# Altium PCB aig2.PcbDoc
Units mm, origin at the board's own origin, x right, y up, seen from the top; angles counter-clockwise.
Board outline 80 x 80 mm, 2 copper layers (Top Layer, Bottom Layer), stack 1.571 mm thick; 98 components, 66 nets, 281 pads, 40 vias.
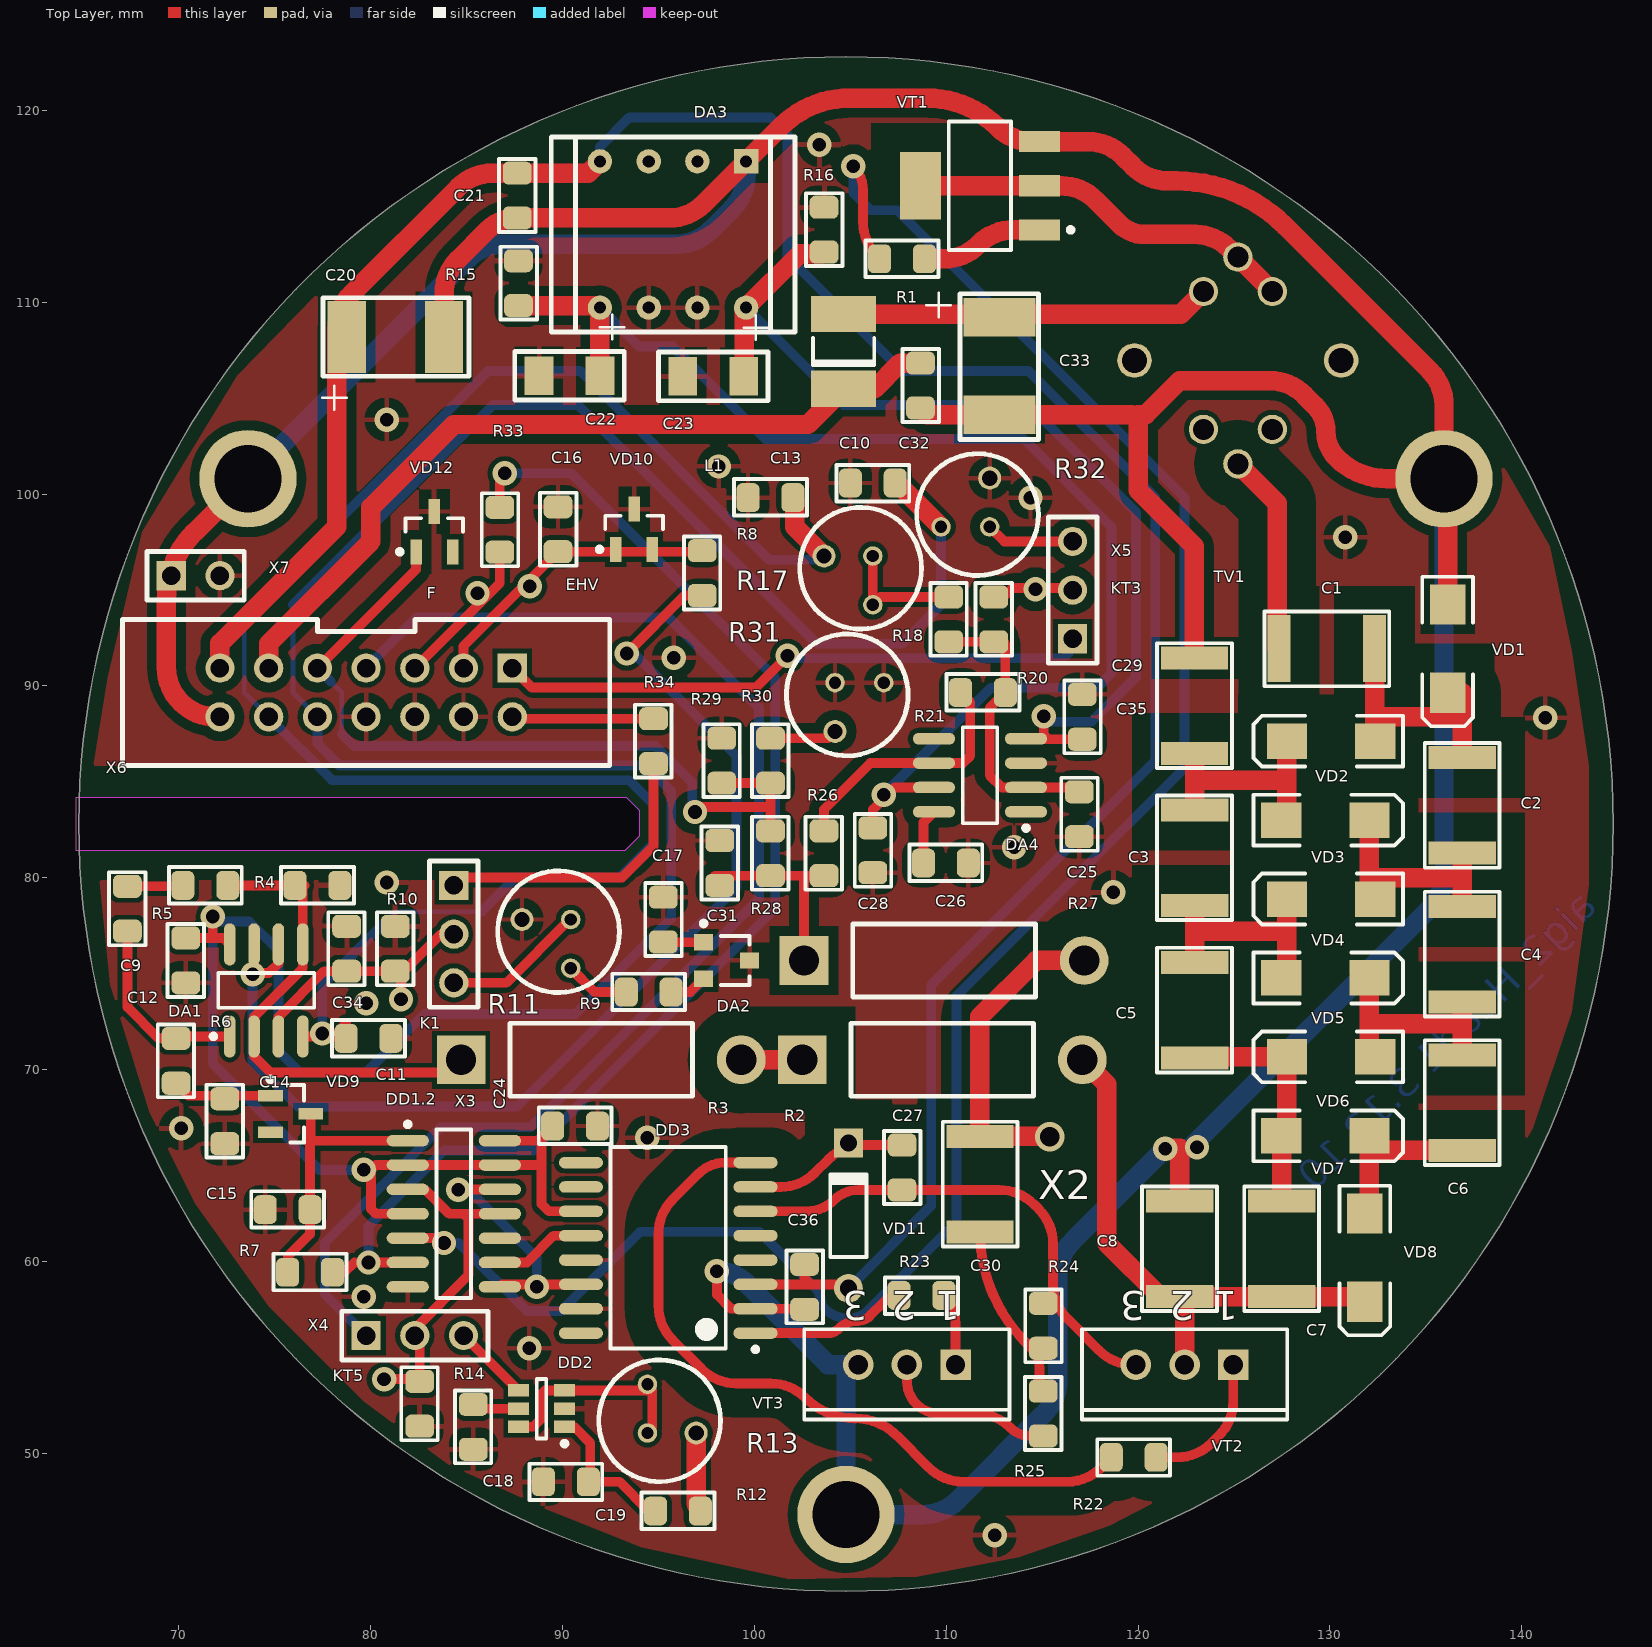
[diagram p0: Top Layer view]
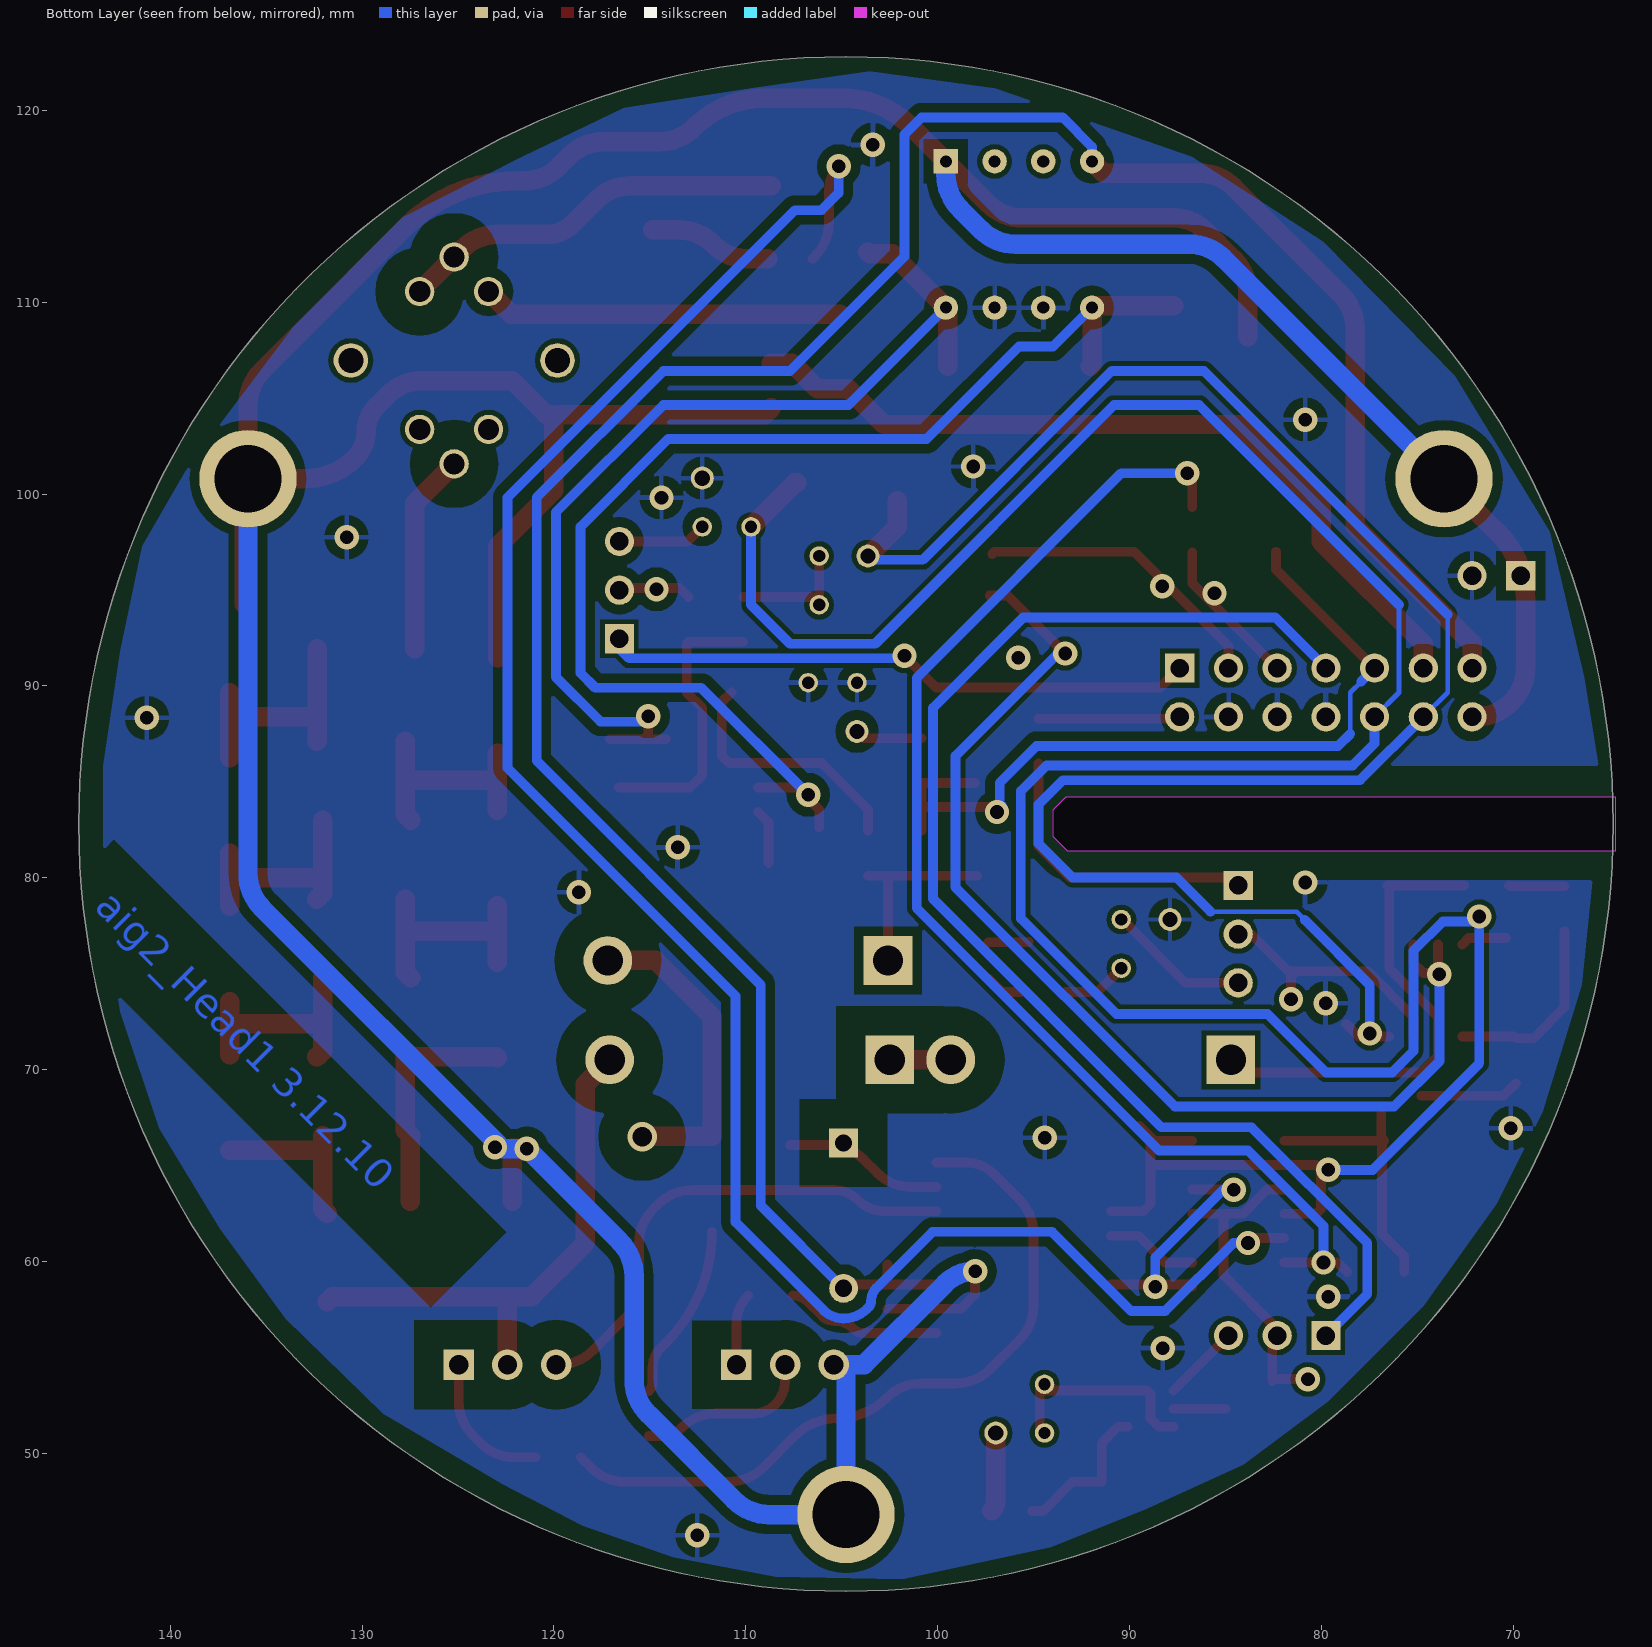
[diagram p1: Bottom Layer view, seen from below]
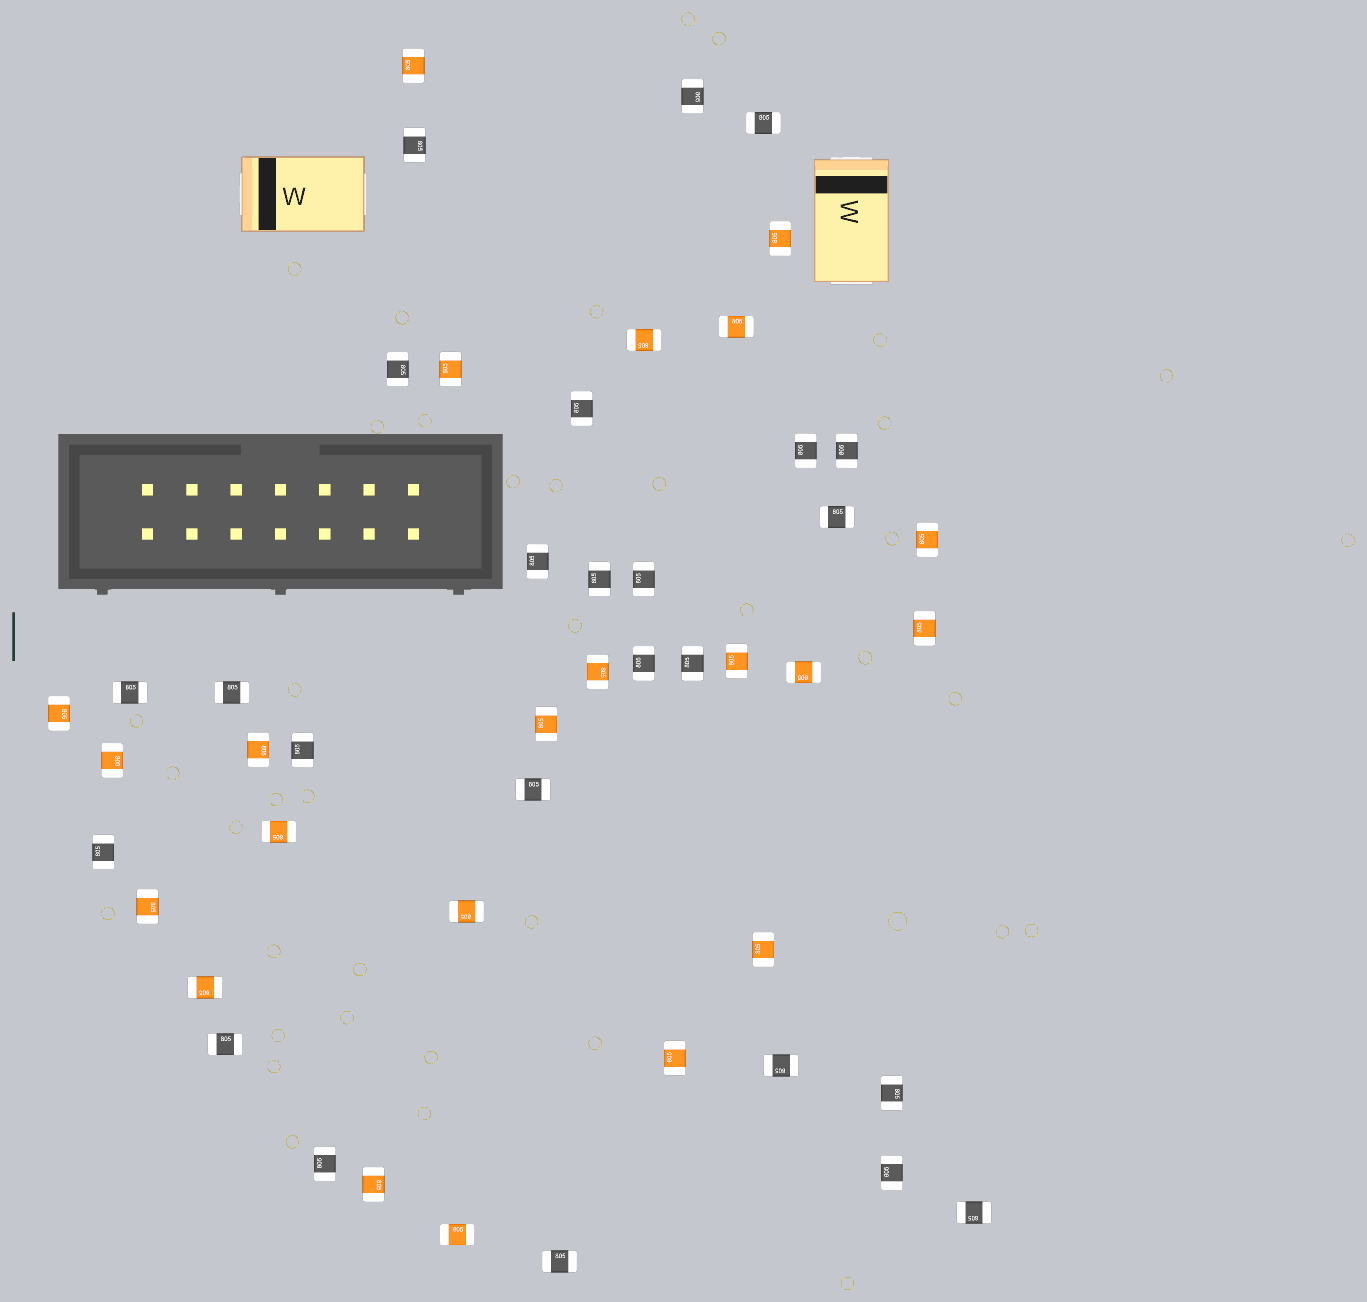
[diagram p2: 3D render of the assembled board from above, using the file's embedded part models]

## Layer stack, top to bottom
Top Layer: signal copper 0.0356
Dielectric: core 1.5, FR-4, Dk 4.8
Bottom Layer: signal copper 0.0356

## Board outline
64.775,82.804 cw(c104.775,82.804) 104.775,122.804 cw(c104.775,82.804) 144.775,82.804 cw(c104.775,82.804) 104.775,42.804 cw(c104.775,82.804)
cut-out: 64.643,84.201 93.325,84.201 93.996,83.53 93.996,82.169 93.99,82.169 93.228,81.407 64.643,81.407

## Design rules (kind name [scope] priority, off if disabled: settings)
Clearance lv_+24 [InNetClass('LV_+24') vs InNetClass('LV_+24')] p1: gap=0.508
Clearance nonet_pads [NOT InNet('*') AND IsPad] p2: gap=0.254
Clearance lv [InNetClass('LV') vs InNetClass('LV')] p3: gap=0.254
Clearance lv-lv_24 [InNetClass('LV_+24') vs InNetClass('LV')] p4: gap=0.508
Clearance [All] p5: gap=1.524
ComponentClearance [All] p1 off: gap=0.254 collisioncheckmode=3 verticalgap=0.254 showdistances=FALSE
MinimumSolderMaskSliver [All] p1 off: minsoldermaskwidth=0.254
PolygonConnect [All] p1: connectstyle=Relief reliefconductorwidth=0.254 reliefentries=4 polygonreliefangle="90 Angle"
RoutingVias [All] p1: holewidth=0.711 width=1.27 viastyle="Through Hole" minholewidth=0.711 minwidth=1.27 maxholewidth=0.711 maxwidth=1.27
SilkToSilkClearance [All] p1 off: silktosilkclearance=0.254
SilkscreenOverComponentPads [All] p1 off: minsilkscreentomaskgap=0.254
SolderMaskExpansion [All] p1: expansion=0.102
Width [All] p1: maxlimit=1.016 minlimit=0.254 preferedwidth=0.508
24 further rules are at their usual default settings.

## Classes and differential pairs
net class LV: 2F +3.3V +12.6V -3.3V CONT2ASS CONT2U EASS EHV F GND GND_EXT NetC9_1 NetC9_2 NetC14_1 NetC15_1 NetC17_1 NetC18_1 NetC19_2 NetC25_2 NetC26_2 NetC31_2 NetC34_2 NetDA1_2 NetDA1_6 NetDA2_2 NetDD1.2_3 NetDD1.2_5 NetDD1.2_6 NetDD1.2_8 NetDD1.2_9 NetDD2_3 NetDD2_4 NetDD3_1 NetR9_2 NetR11_2 NetR12_1 NetR17_1 NetR30_1 NetR34_2
net class HV1200: NetC7_2 NetC27_1 NetC27_2 NetDD3_8 NetR22_2
net class LV_+24: +12.6V +24V +EGB -24V EASS GND GND_EXT NetC25_2 NetC26_2 NetC31_2 NetC33_1 NetDA4_6 NetDD1.2_5 NetDD3_1 NetR20_1 NetR30_1 NetR32_2

## Components (designator, comment, footprint, x,y, rotation, side; value= is the part's Value field where it differs from the comment)
C1 "CC1812" CC1812 129.794,91.948 r0 top
C2 "CC1812" CC1812 136.906,83.82 r270 top
C3 "CC1812" CC1812 122.956,81.091 r270 top
C4 "CC1812" CC1812 136.906,76.073 r270 top
C5 "CC1812" CC1812 122.956,73.152 r270 top
C6 "CC1812" CC1812 136.906,68.326 r270 top
C7 "CC1812" CC1812 127.494,60.706 r270 top
C8 "CC1812" CC1812 122.174,60.706 r270 top
C9 "C0805" CC0805 67.31,78.386 r270 top
C10 "C0805" CC0805 106.172,100.584 r0 top
C11 "C0805" CC0805 79.883,71.628 r180 top
C12 "C0805" CC0805 70.358,75.692 r270 top
C13 "C0805" CC0805 100.838,99.822 r180 top
C14 "C0805" CC0805 72.39,67.31 r270 top
C15 "C0805" CC0805 75.665,62.7 r180 top
C16 "C0805" CC0805 89.762,98.171 r90 top
C17 "C0805" CC0805 95.25,77.824 r90 top
C18 "C0805" CC0805 85.344,51.374 r270 top
C19 "C0805" CC0805 90.17,48.514 r0 top
C20 "T492C" "CAPASITOR C" 78.74,108.204 r0 top
C21 "C0805" CC0805 87.63,115.57 r90 top
C22 "CAPASITOR A" "CAPASITOR A" 91.948,106.172 r180 top
C23 "CAPASITOR A" "CAPASITOR A" 99.441,106.144 r180 top
C24 "C0805" CC0805 90.653,67.056 r180 top
C25 "C0805" CC0805 116.94,83.312 r90 top
C26 "C0805" CC0805 109.982,80.772 r180 top
C27 "C0805" CC0805 107.696,64.897 r90 top
C28 "C0805" CC0805 106.172,81.434 r90 top
C29 "C0805" CC0805 117.094,88.392 r90 top
C30 "CC1812" CC1812 111.76,63.981 r90 top
C31 "C0805" CC0805 98.198,80.772 r270 top
C32 "C0805" CC0805 108.66,105.664 r90 top
C33 "T492C" "CAPASITOR C" 112.776,109.22 r270 top
C34 "C0805" CC0805 78.74,76.3 r270 top
C35 "CC1812" CC1812 122.936,88.93 r90 top
C36 "C0805" CC0805 102.616,58.674 r90 top
DA1 "MAX4163ESA" NSO8_N 74.549,74.128 r90 top
DA2 "MAX6120EUR" sot23 98.552,75.692 r270 top
DA3 "AM1P-DZ" Am1p 99.568,117.348 r270 top
DA4 "OPA454IDDA" 182H_N 111.76,85.344 r180 top
DD1.2 "SN74HC74D" D014_N 84.328,62.484 r0 top
DD2 "sn74lvc2g14idbv" sot23-6_N 88.9,52.324 r180 top
DD3 "IR2213S" SOIC16_N 95.504,60.706 r180 top
L1 "LQH43CN101K" 1812 104.648,107.442 r90 top
R1 "" RR0805 107.696,112.268 r180 top
R2 "RES15MM" RES15MM 102.489,70.512 r0 top
R3 "RES15MM" RES15MM 84.709,70.512 r0 top
R4 "" RR0805 77.216,79.602 r180 top
R5 "" RR0805 71.374,79.602 r180 top
R6 "" RR0805 69.85,70.458 r270 top
R7 "" RR0805 76.835,59.436 r180 top
R8 "" RR0805 97.282,95.885 r270 top
R9 "" RR0805 94.488,74.041 r180 top
R10 "" RR0805 81.28,76.3 r270 top
R11 "82p" 82p 90.424,75.284 r90 top
R12 "" RR0805 96.012,46.99 r180 top
R13 "82p" 82p 94.422,53.594 r270 top
R14 "" RR0805 82.55,52.578 r270 top
R15 "" RR0805 87.7,110.998 r90 top
R16 "" RR0805 103.632,113.792 r90 top
R17 "82p" 82p 106.172,94.234 r90 top
R18 "" RR0805 110.132,93.472 r270 top
R20 "" RR0805 112.482,93.472 r270 top
R21 "" RR0805 111.914,89.662 r180 top
R22 "" RR0805 119.774,49.784 r0 top
R23 "" RR0805 108.712,58.226 r0 top
R24 "" RR0805 115.062,56.642 r90 top
R25 "" RR0805 115.062,52.07 r270 top
R26 "" RR0805 103.632,81.28 r270 top
R27 "RES15MM" RES15MM 102.589,75.692 r0 top
R28 "" RR0805 100.838,81.28 r270 top
R29 "" RR0805 98.298,86.106 r270 top
R30 "" RR0805 100.838,86.106 r270 top
R31 "82p" 82p 106.743,90.17 r180 top
R32 "82p" 82p 109.728,98.298 r0 top
R33 "" RR0805 86.728,98.144 r90 top
R34 "" RR0805 94.742,87.122 r270 top
TV1 "KV4" kv4 125.204,101.582 r135 top
VD1 "S1M" DO214 136.144,91.948 r270 top
VD2 "S1M" DO214 130.062,87.122 r180 top
VD3 "S1M" DO214 129.762,83.007 r0 top
VD4 "S1M" DO214 130.062,78.892 r180 top
VD5 "S1M" DO214 129.762,74.778 r0 top
VD6 "S1M" DO214 130.062,70.663 r180 top
VD7 "S1M" DO214 129.762,66.548 r0 top
VD8 "S1M" DO214 131.826,60.198 r270 top
VD9 "BAT54A" SOT23_N 75.819,67.691 r0 top
VD10 "BAT54A" SOT23_N 93.726,98.171 r90 top
VD11 "BY255" SOD27 104.902,62.384 r90 top
VD12 "BAT54A" SOT23_N 83.312,98.044 r90 top
VT1 "IRLL2705" SOT-223 111.76,116.078 r90 top
VT2 "STP3N50" TO-220AB 122.428,54.61 r180 top
VT3 "STP3N50" TO-220AB 107.95,54.614 r180 top
X3 "JP3" "PLS-3 2.54" 84.328,79.602 r270 top
X4 "JP3" "PLS-3 2.54" 79.756,56.134 r0 top
X5 "JP3" "PLS-3 2.54" 116.586,92.456 r90 top
X6 "IDC14M" IDC14M 87.376,90.932 r180 top
X7 "PLS-2" "PLS-2 2.54" 69.596,95.748 r0 top

## Footprints (in the part's own frame and the unit in brackets; to place one, negate y for a bottom-side part, rotate by r counter-clockwise, add the part's x,y. Pads: shape width x height; smd on the part's side, far side on the other; paste and mask are expansions set on the pad)
82p [mil]
  round 40 hole 25: 1(0,0) 2(100,0)
  round 47.24 hole 31.5: 3(100,100)
  silkscreen extent -50,-100 200,150
182H_N [mm] "SOIC, 8-Leads, Body 4.9x3.9mm, Pitch 1.27mm, IPC Medium Density"
  oval 2.2x0.6 smd: 1(-2.4,1.905) 2(-2.4,0.635) 3(-2.4,-0.635) 4(-2.4,-1.905) 5(2.4,-1.905) 6(2.4,-0.635) 7(2.4,0.635) 8(2.4,1.905)
  silkscreen extent -2.53,-2.5 0.9,2.88, body extent -1.95,-2.45 1.95,2.45, height 1.75
1812 [mm] "Chip Capacitor; Body 4.5 x 3.2 mm (LxW typ)"
  rect 1.9x3.4 smd: 1(-1.95,0) 2(1.95,0)
  silkscreen extent -0.7,-1.6 0.7,1.6
Am1p [mm]
  rect 1.27x1.27 hole 0.635: 1(0,0)
  round 1.27 hole 0.635: 2(0,-2.54) 3(0,-5.08) 4(0,-7.62) 5(7.62,-7.62) 6(7.62,-5.08) 7(7.62,-2.54) 8(7.62,0)
  silkscreen extent -1.27,-10.16 8.89,2.54, body extent -1.27,-10.16 8.89,2.54, height 8.15
"CAPASITOR A" [mm]
  rect 1.5x2 smd: 1(0,0) 2(3.175,0)
  silkscreen extent -1.27,-3.17 4.44,1.27
"CAPASITOR C" [mm]
  rect 2x3.75 smd: 1(0,0) 2(5.08,0)
  silkscreen extent -1.27,-3.81 6.38,2.04, body extent -1.08,-2.18 6.22,2.12, height 1.5
CC0805 [mm]
  rrect50% 1.2x1.5 smd: 1(-1.17,0) 2(1.17,0)
  silkscreen extent -1.9,-0.96 1.9,0.94, body extent -1.03,-0.62 0.97,0.63, height 0.78
CC1812 [mm]
  rect 1.2x3.5 smd: 1(-2.44,0) 2(2.54,0)
  silkscreen extent -3.2,-1.96 3.3,1.94
D014_N [mm] "SOIC, 14-Leads, Body 8.7x3.9mm, Pitch 1.27mm, IPC Medium Density"
  oval 2.2x0.6 smd: 1(-2.4,3.81) 2(-2.4,2.54) 3(-2.4,1.27) 4(-2.4,0) 5(-2.4,-1.27) 6(-2.4,-2.54) 7(-2.4,-3.81) 8(2.4,-3.81) 9(2.4,-2.54) 10(2.4,-1.27) 11(2.4,0) 12(2.4,1.27) 13(2.4,2.54) 14(2.4,3.81)
  silkscreen extent -2.52,-4.4 0.9,4.78, body extent -1.95,-4.33 1.95,4.33, height 1.75
DO214 [mm] "DO-214-AC/SMA; 2 C-Bend Leads; Body 5.3 x 2.6 mm, inc. leads (LxW)"
  rect 2.1x1.85 smd: 1(-2.3,0) 2(2.3,0)
  silkscreen extent -3.75,-1.33 4.05,1.33
IDC14M [mil]
  rect 60x60 hole 38: 1(0,0)
  round 60 hole 38: 2(0,100) 3(100,0) 4(100,100) 5(200,0) 6(200,100) 7(300,0) 8(300,100) 9(400,0) 10(400,100) 11(500,0) 12(500,100) 13(600,0) 14(600,100)
  silkscreen extent -200,-100 800,200, body extent -211,-137 791,225, height 130
kv4 [mm]
  round 1.524 hole 1.1: 1(0,0) 2(2.54,0) 3(7.62,-5.08) 4(7.62,-7.62) 5(5.08,-7.62) 6(0,-2.54)
  round 1.8 hole 1.3: 7(7.62,0) 8(0,-7.62)
NSO8_N [mm] "SOIC, 8-Leads, Body 4.9x3.9mm, Pitch 1.27mm, IPC Medium Density"
  oval 2.2x0.6 smd: 1(-2.4,1.905) 2(-2.4,0.635) 3(-2.4,-0.635) 4(-2.4,-1.905) 5(2.4,-1.905) 6(2.4,-0.635) 7(2.4,0.635) 8(2.4,1.905)
  silkscreen extent -2.52,-2.5 0.9,2.88, body extent -2,-2.5 2,2.5, height 1.75
"PLS-2 2.54" [mil]
  rect 60x60 hole 38: 1(0,0)
  round 60 hole 38: 2(100,0)
  silkscreen extent -50,-50 150,50
"PLS-3 2.54" [mil]
  rect 60x60 hole 38: 1(0,0)
  round 60 hole 38: 2(100,0) 3(200,0)
  silkscreen extent -50,-50 250,50
RES15MM [mil]
  rect 100x100 hole 62: 1(0,0)
  round 100 hole 62: 2(575,0)
  silkscreen extent 100,-75 475,75
RR0805 [mm]
  rrect50% 1.2x1.5 smd: 1(-1.17,0) 2(1.17,0)
  silkscreen extent -1.9,-0.96 1.9,0.94, body extent -1,-0.62 1,0.62, height 0.78
SOD27 [mm] "Diode, Axial; Body 4.3 x 1.9 mm (LxDia. max), Lead Dia. 0.56 mm (max)"
  round 1.5 hole 0.9: 1(-3.79,0)
  rect 1.5x1.5 hole 0.9: 2(3.79,0)
  silkscreen extent -2.15,-0.95 2.25,0.95
SOIC16_N [mm] "SOIC, 16-Leads, Body 10.3x7.5mm, Pitch 1.27mm, IPC Medium Density"
  oval 2.3x0.6 smd: 1(-4.55,4.445) 2(-4.55,3.175) 3(-4.55,1.905) 4(-4.55,0.635) 5(-4.55,-0.635) 6(-4.55,-1.905) 7(-4.55,-3.175) 8(-4.55,-4.445) 9(4.55,-4.445) 10(4.55,-3.175) 11(4.55,-1.905) 12(4.55,-0.635) 13(4.55,0.635) 14(4.55,1.905) 15(4.55,3.175) 16(4.55,4.445)
  silkscreen extent -4.67,-5.25 3,5.42, body extent -3.75,-5.15 3.75,5.15, height 2.65
sot23 [mm] "SOT-23; 3 Leads; Body 3.0 x 2.5 mm, inc. leads (LxW max)"
  rect 0.85x1 smd: 1(-0.95,-1.2) 2(0.95,-1.2) 3(0,1.2)
  silkscreen extent -2.05,-1.32 1.28,1.2
sot23-6_N [mm] "SOT23, 6-Leads, Body 2.9x1.6mm, Pitch 0.95mm, Lead Span 2.8mm, IPC Medium Density"
  rect 1.1x0.65 smd: 1(-1.2,0.95) 2(-1.2,0) 3(-1.2,-0.95) 4(1.2,-0.95) 5(1.2,0) 6(1.2,0.95)
  silkscreen extent -1.33,-1.55 0.25,1.95, body extent -0.9,-1.55 0.9,1.55, height 1.45
SOT23_N [mm] "SOT23, 3-Leads, Body 2.9x1.3mm, Pitch 0.95mm, Lead Span 2.3mm, IPC Medium Density"
  rect 1.3x0.6 smd: 1(-1.05,0.95) 2(-1.05,-0.95) 3(1.05,0)
  silkscreen extent -1.17,-1.5 0.7,1.92, body extent -0.7,-1.5 0.7,1.5, height 1.1
SOT-223 [mm] "SOT-223/SC-73; 4 Leads; Body 6.7 x 7.3 mm, inc. leads (LxW max)"
  rect 1.1x2.15 smd: 1(-2.3,-3.1) 2(0,-3.1) 3(2.3,-3.1)
  rect 3.5x2.15 smd: 4(0,3.1)
  silkscreen extent -3.35,-4.85 3.35,1.63
TO-220AB [mm] "TO, Thru-Hole, Vertical, Heatsink Mounted; 3 In-Line Leads; Pitch 2.54 mm"
  rect 1.6x1.6 hole 1: 1(-2.54,0)
  round 1.6 hole 1: 2(0,0) 3(2.54,0)
  silkscreen extent -5.35,-1.85 5.35,2.85

## Part data
C9 C10 C11 C12 C13 C14 C15 C16 C17 C18 C19 C21 C24 C25 C26 C27 C28 C29 C31 C32 C34 C36: "Ceramic Chip Capacitor - Standard"
C20 C33: "Solid Tantalum Chip Capacitor, T492 Series - CWR11 Style Per Mil-PRF-55365/8"
DA1: "Dual Micropower, Single-Supply, Rail-to-Rail I/O Op Amp"
DA2: library part MAX6120, "Микросхема"
DA3: "DC/DC Перобразователь"
DA4: library part OPA27GU, "Ultra-Low-Noise Precision Operational Amplifiers"
DD1.2: "Dual D-Type Positive-Edge-Triggered Flip-Flop with Clear and Preset"
DD2: "Микросхема"
DD3: library part IR2113S, "High and Low Side Driver"
L1: library part CDRH127, "Дроссель"
R1 R4 R5 R6 R7 R8 R9 R10 R12 R14 R15 R16 R18 R20 R21 R22 R23 R24 R25 R26 R28 R29 R30 R33 R34: library part R_0805, "R_0805"
R11 R13 R17 R31 R32: "Резистор"
TV1: "Трансформатор"
VD1 VD2 VD3 VD4 VD5 VD6 VD7 VD8: library part BZG03C10, "Silicon Zener Diode (3W)"
VD9 VD10 VD12: "Schottky Barrier Double Diode"
VD11: library part BZX79-B15, "Диод"
VT1: "HEXFET Power MOSFET"
VT2 VT3: library part IRF740, "HEXFET N-Channel Power MOSFET"

## Free pads (board coordinates)
  round 5.08 hole 3.5: 0(73.598,100.804) 0(104.775,46.804) 0(135.952,100.804)

## Via types
v1: diameter 1.27, hole 0.711, Top Layer to Bottom Layer, 39 vias
v2: diameter 1.524, hole 1.016, Top Layer to Bottom Layer, 1 vias

## Nets (pads, with @x,y where several pads share a name; then routed paths per layer and width w, separated by ;. In a path a pad name is that pad's centre, name@x,y a point inside that pad or via, vN(x,y) a via of type N, cw(c..) or ccw(c..) an arc to the next point about the centre after c; other vN are vias at no path point)
2F: X4.1 X6.7 | length 69.3
  Bottom Layer w0.508: X4.1 77.597,58.293 77.597,60.96 83.629,66.992 88.328,66.992 100.244,78.908 100.244,88.859 95.535,93.568 82.392,93.568 X6.7
+3.3V: C10.2 C12.1 C24.2 DA1.8 DD1.2.2 DD1.2.4 DD1.2.13 DD1.2.14 DD3.11 R32.1 X6.10 | length 162.4
  Top Layer w0.508: C12.1 71.755,76.862 ; v1(71.755,77.978) 71.755,76.862 ; DA1.8 72.31,76.862 71.755,76.862 ; v1@79.883,64.643 v1@80.01,64.77 ; DD1.2.4 80.264,62.484 80.01,62.738 v1@80.01,64.77 ; DD1.2.14 88.721,66.294 88.9,66.473 ; C24.2 88.9,66.473 ; DD3.11 89.281,62.611 88.9,62.992 88.9,65.024 ; v1@80.01,64.77 80.264,65.024 DD1.2.2 DD1.2.13 88.9,65.024 ; 88.9,65.024 88.9,66.473
  Top Layer w1.016: C10.2 107.442,100.584 R32.1
  Bottom Layer w0.254: 75.946,94.234 75.946,89.662 X6.10
  Bottom Layer w0.508: 75.946,94.234 86.36,104.648 90.805,104.648 103.251,92.202 107.696,92.202 109.728,94.234 R32.1 ; X6.10 77.216,86.995 78.359,85.852 94.324,85.852 95.658,84.518 95.658,77.878 90.678,72.898 82.804,72.898 79.756,69.85 76.3,69.85 75.184,70.966 75.184,76.2 73.66,77.724 72.009,77.724 v1(71.755,77.978) 71.755,70.331 77.316,64.77 v1(79.629,64.77)
+12.6V: C20.1 C21.2 C36.2 DA3.4 DD3.3 VD11.1 X6.13 | length 134.2
  Top Layer w0.508: DD3.3 102.958,58.801 ; C36.2 102.616,59.143 102.958,58.801 ; VD11.1 104.695,58.801 102.958,58.801
  Top Layer w1.016: X6.13 72.136,92.216 78.232,98.312 78.232,108.617 cw(c80.772,108.617) 78.976,110.413 84.559,115.996 cw(c86.355,114.2) 86.355,116.74 C21.2 91.34,116.74 DA3.4
  Bottom Layer w0.508: DA3.4 91.948,118.11 93.472,119.634 100.838,119.634 101.727,118.745 101.727,112.395 107.696,106.426 114.3,106.426 120.904,99.822 120.904,86.106 109.22,74.422 109.22,62.912 VD11.1
+24V: C22.1 C28.2 DA3.5 DA4.7 R15.1 | length 65.5
  Top Layer w0.508: C28.2 106.172,83.566 107.315,84.709 DA4.7
  Top Layer w1.016: R15.1 91.848,109.828 DA3.5 91.948,106.78 C22.1@92.048,106.68
  Bottom Layer w0.508: DA3.5 93.98,107.696 95.758,107.696 100.584,102.87 114.046,102.87 118.618,98.298 118.618,90.678 117.847,89.907 112.323,89.907 v1(106.743,84.328)
+EGB: C32.2 L1.1 X6.11 | length 42.4
  Top Layer w1.016: X6.11 74.676,92.202 80.01,97.536 80.01,99.314 84.328,103.632 102.788,103.632 L1.1 106.254,105.492 107.596,106.834 C32.2
-3.3V: C11.2 C13.1 DA1.4 R17.3 X6.12 | length 98.4
  Top Layer w0.508: DA1.4 78.051,71.728 78.713,72.39
  Top Layer w1.016: C13.1@102.108,99.668 102.108,98.298 R17.3
  Bottom Layer w0.254: 73.406,93.726 73.406,89.662 X6.12 ; 80.853,77.805 81.28,78.232 85.769,78.232
  Bottom Layer w0.508: 73.406,93.726 86.106,106.426 90.922,106.426 100.773,96.575 103.433,96.575 R17.3 ; X6.12 77.978,85.09 93.472,85.09 94.742,83.82 94.742,81.788 92.964,80.01 87.547,80.01 85.769,78.232 ; v1(77.47,71.882) 77.47,74.422 80.853,77.805
-24V: C23.1 C29.1 DA3.8 DA4.4 R16.1 | length 52
  Top Layer w0.508: DA4.4@114.173,87.249 DA4.4 114.187,87.222 115.316,87.222 ; v1(115.085,88.42) 115.085,87.453 115.316,87.222 ; C29.1 115.316,87.222
  Top Layer w1.016: C23.1@99.468,106.68 99.468,109.628 DA3.8 102.362,112.522 103.532,112.522 R16.1
  Bottom Layer w0.508: DA3.8 104.648,104.648 114.3,104.648 119.888,99.06 119.888,90.454 117.572,88.138 115.085,88.138 v1(115.085,88.42)
CONT2ASS: X5.1 X6.1 | length 31.3
  Top Layer w0.508: X6.1 88.392,89.916 100.076,89.916 v1(101.727,91.567)
  Bottom Layer w0.508: v1(101.727,91.567) 101.854,91.44 116.078,91.44 X5.1@117.094,92.456
CONT2U: R34.1 X6.2 | length 7.4
  Top Layer w0.508: X6.2 87.476,88.292 R34.1
EASS: R28.1 R29.2 R30.2 VD12.1 X6.9 | length 42.3
  Top Layer w0.508: X6.9 82.362,96.078 VD12.1 ; v1@96.688,83.693 100.838,83.693 ; v1(96.901,83.428) v1@96.901,83.48 ; R29.2@98.044,84.936 R29.2 R30.2 100.838,83.693 ; R28.1 100.838,83.693
  Bottom Layer w0.254: 77.917,90.231 78.486,89.662 78.486,87.503
  Bottom Layer w0.508: X6.9 77.917,90.231 ; 78.486,87.503 79.121,86.868 94.84,86.868 96.763,84.944 96.763,84.063 ; v1@96.63,83.752 96.901,83.48 v1(96.901,83.428)
EHV: C16.1 R8.1 VD10.1 VD10.2 X6.3 | length 15.6
  Top Layer w0.508: X6.3 84.836,92.075 C16.1 97.028,97.001 R8.1@97.155,96.874
  other v1: 88.291,95.194
F: R33.1 X6.5 | length 7.9
  Top Layer w0.508: X6.5 86.728,95.364 R33.1
  other v1: 85.561,94.842
GND: C10.1 C11.1 C12.2 C13.2 C14.2 C15.2 C16.2 C17.2 C18.2 C19.1 C22.2 C23.2 C24.1 C25.1 C26.1 C28.1 C29.2 C31.1 C34.1 DA2.3 DA3.6 DA3.7 DA4.3 DD1.2.7 DD1.2.10 DD2.2 DD3.13 DD3.15 R4.1 R10.1 R11.3 R14.2 R15.2 R16.2 R29.1 R31.1 R31.2 R32.3 VD10.3 VD12.3 X6.4 X6.6 X6.8 X7.2
  other v1: 112.522,45.72 88.261,55.472 79.627,58.166 94.409,66.455 70.114,66.941 79.756,73.467 118.702,79.248 80.83,79.756 113.538,81.598 141.224,88.337 95.8,91.47 130.81,97.755 114.391,99.822 98.142,101.441 80.827,103.886 103.378,118.214
GND_EXT: C8.1 C20.2 C21.1 C32.1 C33.2 C35.2 C36.1 DA3.1 DD3.2 pad.0 VD1.1 VT1.3 VT3.3 X6.14 X7.1 | length 265.7
  Top Layer w0.508: v1(98.044,59.495) 98.044,58.265 98.778,57.531 DD3.2 102.589,57.531 C36.1
  Top Layer w1.016: X6.14 71.91,88.392 cw(c71.91,90.932) 70.114,89.136 70.086,89.164 cw(c71.882,90.96) 69.342,90.96 69.342,94.488 cw(c74.315,94.488) 70.799,98.004 pad.0@73.598,100.804 ; C20.2 83.82,110.453 cw(c86.36,110.453) 84.564,112.249 86.069,113.753 cw(c87.63,112.192) C21.1 95.568,114.4 ccw(c95.568,116.94) 97.364,115.144 DA3.1 101.394,119.174 cw(c104.958,115.609) 104.958,120.65 108.999,120.65 cw(c108.999,115.433) 112.688,119.122 ccw(c114.484,120.918) 114.484,118.378 VT1.3 117.399,118.378 cw(c117.399,115.838) 119.195,117.634 119.753,117.076 ccw(c121.549,118.872) 121.549,116.332 121.996,116.332 cw(c121.996,108.302) 127.674,113.98 135.208,106.446 cw(c133.412,104.65) 135.952,104.65 pad.0@135.952,100.804 ; C32.1 109.014,104.14 C33.2 119.634,104.14 ; v1(121.412,65.881) 121.435,65.904 122.174,65.904 C8.1 ; C35.2 122.936,97.282 120.018,100.2 120.018,104.14 120.396,104.14 122.174,105.918 126.865,105.918 cw(c126.865,103.378) 128.661,105.174 129.237,104.598 ; 129.237,104.598 cw(c127.891,103.253) 129.794,103.253 ccw(c131.713,103.253) 130.356,101.895 ccw(c132.991,104.53) 132.991,100.804 pad.0@135.952,100.804 ; pad.0@135.83,100.926 pad.0@135.952,100.804 ; VD1.1 136.144,100.34 ccw(c135.488,100.34) pad.0@135.952,100.804
  Bottom Layer w1.016: pad.0@73.598,100.804 85.08,112.286 cw(c86.876,110.49) 86.876,113.03 95.93,113.03 ccw(c95.93,115.57) 97.726,113.774 98.824,114.872 ccw(c97.028,116.668) 99.568,116.668 DA3.1 ; v1(98.044,59.495) cw(c98.044,57.308) 99.59,58.854 103.83,54.614 104.574,54.614 ; VT3.3 104.574,54.614 ; v1@122.682,65.881 v1(121.412,65.881) 116.568,61.037 ccw(c118.364,59.241) 115.824,59.241 115.824,53.832 cw(c113.284,53.832) 115.08,52.036 110.592,47.548 cw(c108.796,49.344) 108.796,46.804 104.775,46.804 104.775,54.413 104.574,54.614 ; v1@122.917,66.117 135.208,78.407 ccw(c133.412,80.203) 135.952,80.203 pad.0@135.952,100.804
  other v1: 123.078,65.956
NetC1_1: C1.1 TV1.1 | length 10.5
  Top Layer w1.016: TV1.1 127.254,99.532 C1.1@127.254,91.948
NetC1_2: C1.2 C2.1 VD1.2 VD2.1 | length 12.8
  Top Layer w1.016: C1.2 132.334,88.392 ; VD2.1 132.334,87.15 132.334,88.392 ; C2.1 136.906,88.392 ; VD1.2@136.906,89.648 136.906,88.392 ; 132.334,88.392 136.906,88.392
NetC2_2: C2.2 C4.1 VD3.2 VD4.1 | length 12
  Top Layer w1.016: VD3.2 132.062,80.264 ; VD4.1 132.062,79.192 132.062,80.264 ; C4.1 136.906,80.01 ; C2.2 136.906,80.01 ; 132.062,80.264 132.316,80.01 136.906,80.01
NetC3_1: C3.1 C35.1 VD2.2 VD3.1 | length 12.1
  Top Layer w1.016: C35.1 122.956,86.47 122.956,85.09 ; C3.1 122.956,85.09 ; VD3.1 127.762,83.307 127.762,85.217 ; VD2.2 127.762,85.217 ; 122.956,85.09 127.635,85.09 127.762,85.217
NetC3_2: C3.2 C5.1 VD4.2 VD5.1 | length 12
  Top Layer w1.016: C5.1 122.956,77.216 ; C3.2 122.956,77.216 ; VD5.1 127.762,75.078 127.762,77.139 ; VD4.2 127.762,77.139 ; 122.956,77.216 127.685,77.216 127.762,77.139
NetC4_2: C4.2 C6.1 VD5.2 VD6.1 | length 11.9
  Top Layer w1.016: VD5.2 132.062,72.39 ; VD6.1 132.062,70.963 132.062,72.39 ; C6.1 136.906,72.15 ; C4.2 136.906,72.15 ; 132.062,72.39 136.666,72.39 136.906,72.15
NetC5_2: C5.2 C7.1 VD6.2 VD7.1 | length 12.5
  Top Layer w1.016: C5.2 123.007,70.663 VD6.2 127.762,66.848 VD7.1@127.494,66.58 ; VD7.1 VD7.1@127.494,66.58 ; C7.1 VD7.1@127.494,66.58
NetC6_2: C6.2 VD7.2 VD8.1 | length 9
  Top Layer w1.016: VD8.1 132.062,62.734 VD7.2@132.062,65.881 ; VD7.2 VD7.2@132.062,65.881 ; C6.2 132.157,65.786 VD7.2@132.062,65.881
NetC7_2: C7.2 C8.2 R2.2 VD8.2 VT2.2 | length 28.5
  Top Layer w1.016: R2.2 118.364,69.242 118.364,60.96 121.158,58.166 C8.2 ; VT2.2 122.428,57.912 C8.2 ; VD8.2 131.558,58.166 C7.2 C8.2
NetC9_1: C9.1 R5.2 | length 2.9
  Top Layer w0.508: C9.1 70.158,79.556 R5.2
NetC9_2: C9.2 DA1.1 R6.1 | length 10
  Top Layer w0.508: C9.2 67.31,73.252 68.934,71.628 R6.1 69.95,71.728 DA1.1
NetC14_1: C14.1 R6.2 VD9.1 | length 5.2
  Top Layer w0.508: R6.2 70.497,68.641 VD9.1
NetC15_1: C15.1 DD1.2.1 R7.2 VD9.3 | length 14.2
  Top Layer w0.508: R7.2 75.665,60.252 76.835,61.422 C15.1 76.835,66.294 ; VD9.3 76.869,66.455 76.835,66.421 ; DD1.2.1 76.835,66.294 ; 76.835,66.294 76.708,66.294 76.835,66.421 ; 76.835,66.294 76.835,66.421
NetC17_1: C17.1 DA2.1 | length 2.1
  Top Layer w0.508: C17.1 95.262,76.642 DA2.1
NetC18_1: C18.1 DD2.5 | length 2.7
  Top Layer w0.508: C18.1@84.99,52.324 DD2.5
NetC19_2: C19.2 DD2.1 R12.2 | length 8
  Top Layer w0.508: DD2.1 90.612,51.374 91.44,50.546 91.44,48.514 92.964,48.514 94.488,46.99 R12.2 R12.2@95.096,46.99
NetC25_2: C25.2 DA4.2 R18.2 R20.2 R21.1 | length 14.8
  Top Layer w0.508: R18.2 R20.2 112.99,92.302 113.084,92.208 R21.1 112.268,88.846 112.268,85.344 112.903,84.709 DA4.2 C25.2@116.613,84.709
NetC26_2: C26.2 DA4.8 | length 2.9
  Top Layer w0.508: C26.2 108.812,82.891 DA4.8
NetC27_1: C27.1 DD3.6 R24.2 VT2.3 | length 25.9
  Top Layer w0.508: DD3.6 102.744,62.611 ccw(c102.744,64.585) 104.14,63.189 cw(c105.438,61.891) 105.438,63.727 C27.1 112.767,63.727 cw(c112.767,61.187) 114.563,62.983 114.826,62.72 cw(c113.03,60.924) 115.57,60.924 115.57,58.808 ccw(c118.11,58.808) 116.314,57.012 117.972,55.354 ccw(c119.768,57.15) 119.768,54.61 VT2.3
NetC27_2: C27.2 DD3.7 VD11.2 | length 8.3
  Top Layer w0.508: DD3.7 101.366,63.881 ccw(c101.366,66.421) 103.162,64.625 103.86,65.323 cw(c105.656,63.527) 105.656,66.067 C27.2
NetC30_1: C30.1 R24.1 R25.1 | length 9.2
  Top Layer w0.508: C30.1 ccw(c119.908,61.541) 114.146,55.78 114.413,55.513 cw(c113.335,54.434) 114.86,54.434 114.86,53.728 ccw(c115.55,53.728) R25.1
NetC30_2: C30.2 R27.2 | length 16.5
  Top Layer w1.016: v2(115.402,66.493) 115.374,66.521 C30.2 111.76,72.758 114.694,75.692 R27.2
NetC31_2: C31.2 R26.2 R27.1 R28.2 | length 10.1
  Top Layer w0.508: C31.2@97.944,80.11 R28.2 102.489,80.11 ; R27.1 102.589,80.01 102.489,80.11 ; R26.2 102.489,80.11
NetC33_1: C33.1 L1.2 TV1.3 | length 18.8
  Top Layer w1.016: L1.2@105.091,109.392 122.238,109.392 TV1.3
NetC34_2: C34.2 DA1.3 R10.2 X3.2 | length 13.5
  Top Layer w0.508: DA1.3 75.184,72.744 77.57,75.13 C34.2 R10.2 ; v1(81.578,73.66) 81.578,74.832 R10.2 ; X3.2 83.656,77.062 81.724,75.13 R10.2
NetDA1_2: DA1.2 DA1.5 R3.1 R4.2 R5.1 | length 25.4
  Top Layer w0.508: R5.1 R4.2 76.54,79.602 76.454,79.516 DA1.5 76.454,75.284 73.914,72.744 DA1.2 73.914,70.712 74.776,69.85 84.047,69.85 R3.1
NetDA1_6: DA1.6 DA1.7 R8.2 | length 59.7
  Top Layer w0.508: v1@73.787,74.93 v1(73.837,74.98) 73.887,75.03 v1@74.168,75.03 ; DA1.7 73.914,75.284 v1@74.168,75.03 ; DA1.6 75.184,75.538 74.676,75.03 v1@74.168,75.03 ; v1(93.345,91.694) 96.366,94.715 R8.2
  Bottom Layer w0.508: v1(73.837,74.98) 73.837,70.435 76.2,68.072 87.63,68.072 99.06,79.502 99.06,86.36 93.726,91.694 v1(93.345,91.694)
NetDA2_2: DA2.2 R9.1 | length 2
  Top Layer w0.508: R9.1 96.651,74.041 DA2.2
NetDA4_6: DA4.6 R21.2 R26.1 | length 13.4
  Top Layer w0.508: R26.1 103.632,83.566 106.045,85.979 DA4.6 110.871,85.979 111.252,86.36 111.252,89.154 R21.2
NetDD1.2_3: DD1.2.3 DD1.2.11 R14.1 X4.2 | length 17.3
  Top Layer w0.508: v1@80.692,53.874 R14.1@82.55,53.874 ; DD1.2.3 82.818,63.754 84.088,62.484 84.836,62.484 ; R14.1 R14.1@82.55,53.874 ; DD1.2.11 84.836,62.484 ; R14.1@82.55,53.874 82.55,55.88 X4.2 82.296,56.488 85.09,59.282 85.09,62.23 84.836,62.484
  other v1: 80.692,53.848
NetDD1.2_5: DD1.2.5 R1.2 | length 109.3
  Top Layer w0.508: DD1.2.5 83.82,61.214 v1(83.82,60.96) ; v1(105.156,117.094) cw(c103.93,115.868) 105.664,115.868 105.664,114.182 ccw(c108.204,114.182) 106.408,112.386 R1.2
  Bottom Layer w0.508: v1(83.82,60.96) 84.582,60.96 88.133,57.409 89.908,57.409 94.04,61.541 100.269,61.541 103.165,58.645 cw(c102.432,57.912) 103.469,57.912 ccw(c103.887,57.912) 103.591,57.617 ; 103.591,57.617 103.677,57.53 ccw(c104.902,58.755) 104.902,57.023 ccw(c104.902,58.501) 105.947,57.456 110.538,62.047 110.538,73.831 122.428,85.721 122.428,99.822 107.442,114.808 106.045,114.808 105.156,115.697 v1(105.156,117.094)
NetDD1.2_6: DD1.2.6 R7.1 R33.2 | length 65.2
  Top Layer w0.508: 78.64,59.436 79.148,59.944 ; v1(79.883,59.944) DD1.2.6 ; R33.2 86.728,100.832 v1(86.988,101.092)
  Bottom Layer w0.508: v1(79.883,59.944) 79.883,61.849 83.82,65.786 88.451,65.786 101.092,78.427 101.092,90.424 90.424,101.092 v1(86.988,101.092)
NetDD1.2_8: DD1.2.8 DD1.2.12 DD3.14 | length 12.5
  Top Layer w0.508: v1@85.09,63.754 DD1.2.12 ; DD1.2.8 86.855,58.801 DD3.14
  Bottom Layer w0.508: v1@85.09,63.754 88.646,60.198 v1(88.646,58.674)
  other v1: 84.555,63.727
NetDD1.2_9: DD1.2.9 DD3.12 | length 4.8
  Top Layer w0.508: DD1.2.9 88.138,59.944 89.535,61.341 DD3.12
NetDD2_3: DD2.3 DD2.6 R13.1 R13.2 | length 10.5
  Top Layer w0.508: DD2.6 88.458,51.374 88.9,51.816 88.9,53.086 89.088,53.274 DD2.3 94.667,53.274 94.676,53.265 R13.2@94.676,51.308
NetDD2_4: DD2.4 X4.3 | length 4
  Top Layer w0.508: X4.3 84.84,56.134 DD2.4
NetDD3_1: DD3.1 R23.1 | length 8.1
  Top Layer w0.508: DD3.1 103.846,56.261 ccw(c103.846,57.036) 104.394,56.488 cw(c105.379,55.503) 105.379,56.896 ccw(c105.379,57.825) 106.036,57.168 106.777,57.909 cw(c107.542,57.143) R23.1
NetDD3_8: DD3.8 R22.1 | length 38.5
  Top Layer w0.508: DD3.8 98.476,65.151 ccw(c98.476,63.189) 97.088,64.576 95.74,63.228 ccw(c97.536,61.432) 94.996,61.432 94.996,57.695 ccw(c97.536,57.695) 95.74,55.899 97.255,54.384 ccw(c99.051,56.18) 99.051,53.64 100.848,53.64 cw(c100.848,51.1) 102.644,52.896 ccw(c105.252,55.504) 105.252,51.816 cw(c105.252,48.74) 107.427,50.915 109.084,49.258 ccw(c110.88,51.054) 110.88,48.514 116.332,48.514 ccw(c116.332,50.933) 118.042,49.222 R22.1
NetR1_1: R1.1 VT1.1 | length 6.4
  Top Layer w1.016: R1.1 109.884,112.268 ccw(c109.884,114.808) 111.68,113.012 111.702,113.034 cw(c113.498,111.238) 113.498,113.778 VT1.1
NetR2_1: R2.1 R3.2 | length 3.2
  Top Layer w1.016: R3.2 R2.1
NetR9_2: R9.2 R11.1 | length 3.4
  Top Layer w0.508: R11.1 91.667,74.041 R9.2
NetR11_2: R11.2 X3.3 | length 7.5
  Top Layer w0.508: X3.3 87.068,74.522 90.37,77.824 R11.2
NetR12_1: R12.1 R13.3 | length 4.2
  Top Layer w0.508: R12.1 R12.1@97.216,47.024
  Top Layer w1.016: R13.3 96.962,47.521 ccw(c97.713,47.521) R12.1
NetR17_1: R17.1 R17.2 R18.1 | length 6.7
  Top Layer w0.508: R17.2 R17.1 106.58,94.642 R18.1
NetR20_1: R20.1 X5.2 | length 4.3
  Top Layer w0.508: R20.1@112.99,94.642 113.458,95.11 X5.2@117.094,95.11
  other v1: 114.654,95.047
NetR22_2: R22.2 VT2.1 | length 7.5
  Top Layer w0.508: R22.2 122.038,49.784 ccw(c122.038,52.324) 123.834,50.528 124.224,50.918 ccw(c122.428,52.714) 124.968,52.714 VT2.1
NetR23_2: R23.2 VT3.1 | length 3.8
  Top Layer w0.508: R23.2 cw(c108.414,56.758) 110.49,56.758 VT3.1
NetR25_2: R25.2 VT3.2 | length 9.2
  Top Layer w0.508: VT3.2 107.95,53.77 ccw(c109.684,53.77) 108.458,52.544 ccw(c109.602,53.688) 109.602,52.07 111.55,52.07 cw(c111.55,49.53) 113.346,51.326 ccw(c114.375,52.355) 114.375,50.9 R25.2
NetR30_1: R30.1 R31.3 | length 3.5
  Top Layer w0.508: R30.1 103.85,87.276 R31.3
NetR32_2: R32.2 X5.3 | length 5.1
  Top Layer w0.508: R32.2 113.03,97.536 X5.3 X5.3@117.094,97.536
NetR34_2: R34.2 X3.1 | length 15.6
  Top Layer w0.508: X3.1 84.736,80.01 93.091,80.01 94.742,81.661 R34.2
NetTV1_4: TV1.4 TV1.5 VT1.2 VT1.4 | length 20.3
  Top Layer w1.016: VT1.4 VT1.2 115.987,116.078 cw(c115.987,113.538) 117.783,115.334 119.032,114.086 ccw(c120.354,115.408) 120.354,113.538 122.972,113.538 cw(c122.972,110.998) 124.768,112.794 TV1.4 TV1.5
pads on no net: DA3.2 DA3.3 DA4.1 DA4.5 DD3.4 DD3.5 DD3.9 DD3.10 DD3.16 TV1.2 TV1.6 TV1.7 TV1.8 VD9.2 VD12.2

## Polygon pours and split planes (outlines as drawn)
GND on Top Layer "Top Layer-gnd_ext" (solid, remove dead copper, pour order 1000): 65.532,85.825 66.294,90.424 68.072,98.044 73.025,106.172 79.883,113.157 86.748,117.602 97.028,121.158 103.532,122.047 109.728,121.158 116.332,120.142 121.666,117.602 127.889,114.427 133.604,108.712 137.795,103.124 139.192,101.219 141.478,97.282 142.621,91.821 143.51,85.852 143.51,79.629 142.621,73.025 140.589,66.929 137.414,61.722 133.985,57.023 128.905,52.07 122.682,48.387 118.491,46.228 113.792,44.577 108.458,43.561 101.854,43.434 94.107,45.085 89.088,47.117 84.074,49.403 79.629,52.705 74.676,57.658 70.866,62.992 68.453,67.818 66.421,74.422 65.786,80.645 94.234,80.645 95.096,82.804 94.234,85.852
GND on Bottom Layer "Top Layer-gnd_ext" (solid, remove dead copper, pour order 1000): 65.532,85.825 66.294,90.424 68.072,98.044 73.025,106.172 79.883,113.157 86.748,117.602 97.028,121.158 103.532,122.047 109.728,121.158 116.332,120.142 121.666,117.602 127.889,114.427 133.604,108.712 137.795,103.124 139.192,101.219 141.478,97.282 142.621,91.821 143.51,85.852 143.51,79.629 142.621,73.025 140.589,66.929 137.414,61.722 133.985,57.023 128.905,52.07 122.682,48.387 118.491,46.228 113.792,44.577 108.458,43.561 101.854,43.434 94.107,45.085 89.088,47.117 84.074,49.403 79.629,52.705 74.676,57.658 70.866,62.992 68.453,67.818 66.421,74.422 65.786,80.645 94.234,80.645 95.096,82.804 94.234,85.852

## Other copper
Bottom Layer:
  text "aig2_Head1 3.12.10" at 144.018,78.407 h1.52 r45

## Silkscreen, mask and mechanical layers (free items; w line width, h text height)
Top Overlay:
  text "EHV" at 90.17,94.996 h0.61
  text "KT3" at 118.587,94.797 h0.61
  text "F" at 82.906,94.539 h0.61
  text "K1" at 82.542,72.136 h0.61
  text "X2" at 114.808,63.246 h1.52
  text "KT5" at 78.012,53.748 h0.61
Mechanical 1:
  lines w0.254: 64.799,81.408 ccw(c104.775,82.804) 64.799,84.2 93.347,84.2 93.98,83.567 93.98,82.169 93.219,81.408 64.799,81.408

## Text inside footprints (layer, text, board x,y; h text height)
VT2: Top Overlay "2" at 122.928,58.435 h1.5 r180; Top Overlay "1" at 125.218,58.435 h1.5 r180; Top Overlay "3" at 120.388,58.435 h1.5 r180
VT3: Top Overlay "2" at 108.45,58.439 h1.5 r180; Top Overlay "1" at 110.74,58.439 h1.5 r180; Top Overlay "3" at 105.91,58.439 h1.5 r180